# EAGLE board Blinkenlights (EAGLE 6.4)
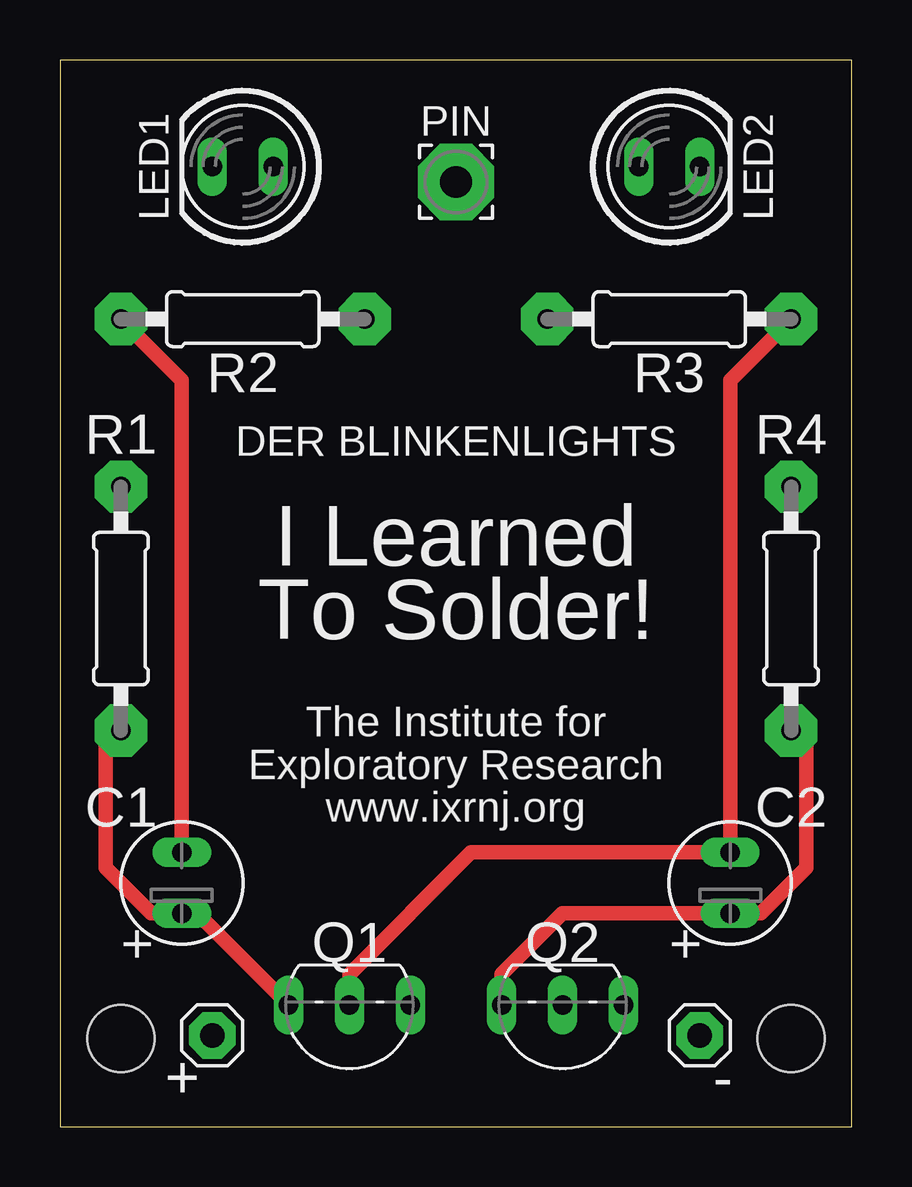
[diagram p0: board, top side]
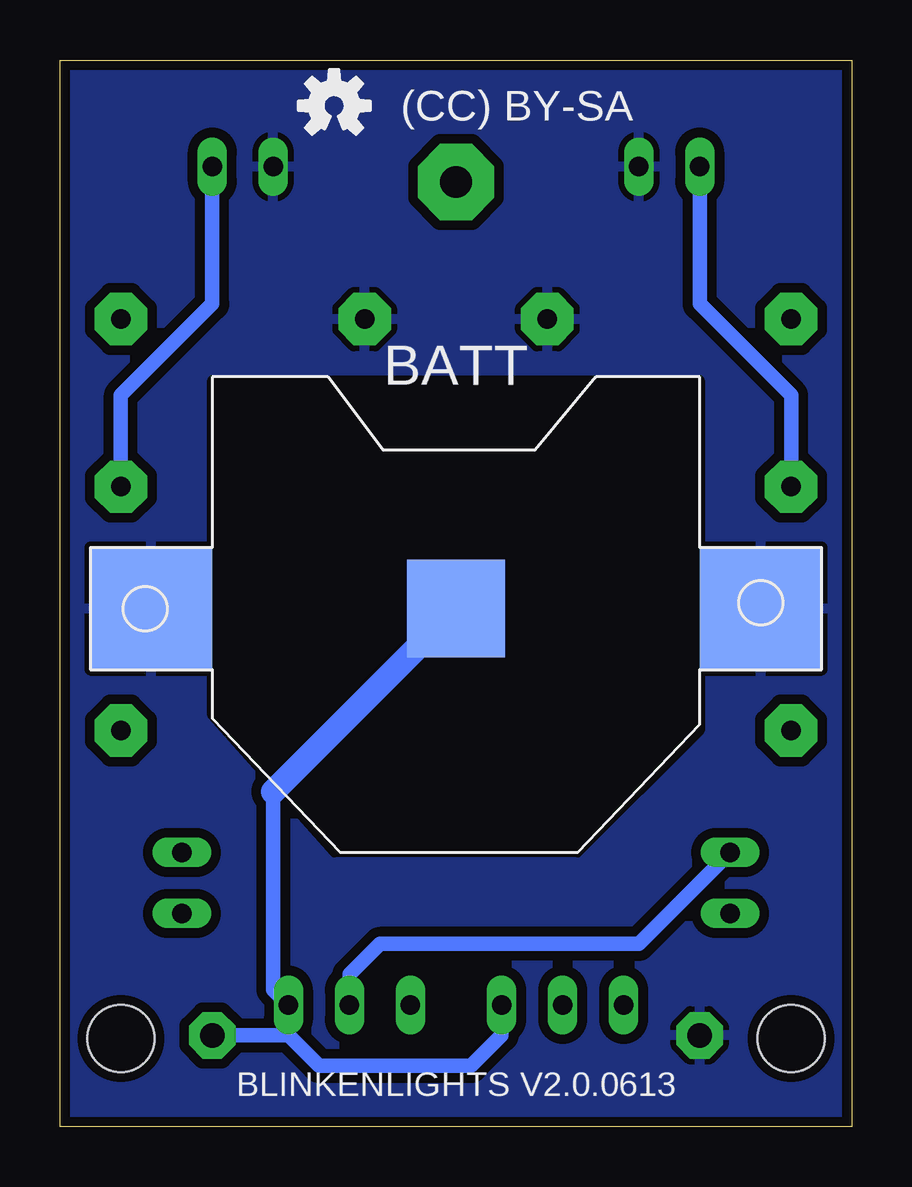
[diagram p1: board, bottom side, seen from below]

Size 33.02 x 44.45 mm. Coordinates in mm from the lower left corner, seen from the top.
Outline: 0,0 33.02,0 33.02,44.45 0,44.45 0,0
Copper layers (1*2*15*16): Top 0.035mm / dielectric 0.2mm / layer 2 0.0175mm / dielectric 1.1mm / layer 15 0.0175mm / dielectric 0.2mm / Bottom 0.035mm
Design rules "SeeedStudio_DRU_no_angle_20130527": minimum track width 6mil, minimum drill 12mil, track to track 6mil, track to pad 6mil, pad to pad 6mil, via to via 6mil, smd to smd 0mil, copper to edge 10mil, drill to drill 10mil, minimum pad ring 6mil, minimum via ring 6mil, stop-mask expansion 2mil, vias tented up to drill 25mil, thermal gap 10mil
Net classes: 0 default: width 0.254 mm, clearance 0.254 mm
Holes 2.8 mm at 2.54,3.68 30.48,3.68

## Footprints (pad centres in the part's own frame; a part is rotated, then mirrored left to right if it is on the bottom)
1X01 = drill 1.016 pad 1.93 octagon: 1 0,0
CR2032-SMD = smd 5.08 x 5.08: +$1 -12.7,0; +$2 12.7,0 | smd 4.064 x 4.064: - 0,0
E-2.54-05 = drill 0.813 long: + -1.27,0; - 1.27,0
LED5MM_BIG = drill 0.813 long: A -1.27,0; K 1.27,0
3,17/1,3 = drill 1.321 pad 3.175 octagon: 1 0,0
TO92-EBC-OVAL = drill 0.813 long: B 0,-1.27; C 2.54,-1.27; E -2.54,-1.27
0207/10_BIG = drill 0.813 pad 2.184 octagon: 1 -5.08,0; 2 5.08,0

## Placement (x,y rotation side)
+  [1X01]  6.35,3.81 0 top
-  [1X01]  26.67,3.81 0 top
BATT  CR2032  [CR2032-SMD]  16.51,21.59 0 bottom
C1  10μF  [E-2.54-05]  5.08,10.16 90 top
C2  10μF  [E-2.54-05]  27.94,10.16 90 top
LED1  [LED5MM_BIG]  7.62,40.01 180 top
LED2  [LED5MM_BIG]  25.4,40.01 0 top
PIN  [3,17/1,3]  16.51,39.37 0 top
Q1  2N2222  [TO92-EBC-OVAL]  12.06,3.81 180 top
Q2  2N2222  [TO92-EBC-OVAL]  20.95,3.81 180 top
R1  220Ω  [0207/10_BIG]  2.54,21.59 90 top
R2  100kΩ  [0207/10_BIG]  7.62,33.66 0 top
R3  100kΩ  [0207/10_BIG]  25.4,33.66 180 top
R4  220Ω  [0207/10_BIG]  30.48,21.59 90 top
U$1  [OSHW-LOGO-S]  21.59,42.55 0 bottom

## Library data of the parts
+ - BATT Q1 Q2 = adafruit
C1 C2 LED1 LED2 R1-R4 = IXR
PIN = wirepad
U$1 = SparkFun

## Nets
GND: -.1 BATT.- Q1.E Q2.E
N$1: C1.+ Q1.C R1.1
N$2: C2.+ Q2.C R4.1
N$3: C1.- Q2.B R2.1
N$4: C2.- Q1.B R3.1
N$5: LED1.K R1.2
N$6: LED2.K R4.2
VCC: +.1 BATT.+$1 BATT.+$2 LED1.A LED2.A R2.2 R3.2

## Tracks (layer width: path | path; a pad name or v marks a point on that pad's centre or on a via)
GND
  Bottom 0.61: 23.5,3.81 22.23,2.54 15.88,2.54 14.61,3.81 Q1.E | 23.5,3.81 Q2.E 24.13,5.71 24.13,13.97 | -.1 23.5,3.81
  Bottom 1.016: BATT.- 24.13,13.97
N$1
  Top 0.61: Q1.C 5.71,8.89 C1.+ 3.81,8.89 1.91,10.79 1.91,15.88 R1.1
N$2
  Top 0.61: R4.1 31.11,15.88 31.11,10.79 29.21,8.89 C2.+ 20.95,8.89 18.41,6.35 Q2.C
N$3
  Top 0.61: C1.- 5.08,31.11 R2.1
  Bottom 0.61: Q2.B 20.95,6.35 19.68,7.62 8.89,7.62 C1.-
N$4
  Top 0.61: Q1.B 12.06,6.35 17.14,11.43 C2.- 27.94,31.11 R3.1
N$5
  Bottom 0.61: R1.2 2.54,30.48 6.35,34.29 LED1.K
N$6
  Bottom 0.61: R4.2 30.48,30.48 26.67,34.29 LED2.K
N$7
  cutout Bottom: 6.35,31.11 6.35,16.51 11.43,11.43 21.59,11.43 26.67,17.14 26.67,31.11
VCC
  pour Bottom (isolate 0.406): 0,0 0,44.45 33.02,44.45 33.02,0

## Text on the board
bPlace: (CC) BY-SA
tNames: DER BLINKENLIGHTS | I Learned / To Solder! | The Institute for / Exploratory Research / www.ixrnj.org
bNames: BLINKENLIGHTS V2.0.0613